# Altium PCB PCB_layout.PcbDoc
Units mil, origin at the board's own origin, x right, y up, seen from the top; angles counter-clockwise.
Board outline 2825 x 2920 mil, 2 copper layers (Top Layer, Bottom Layer); 41 components, 32 nets, 139 pads, 18 vias.
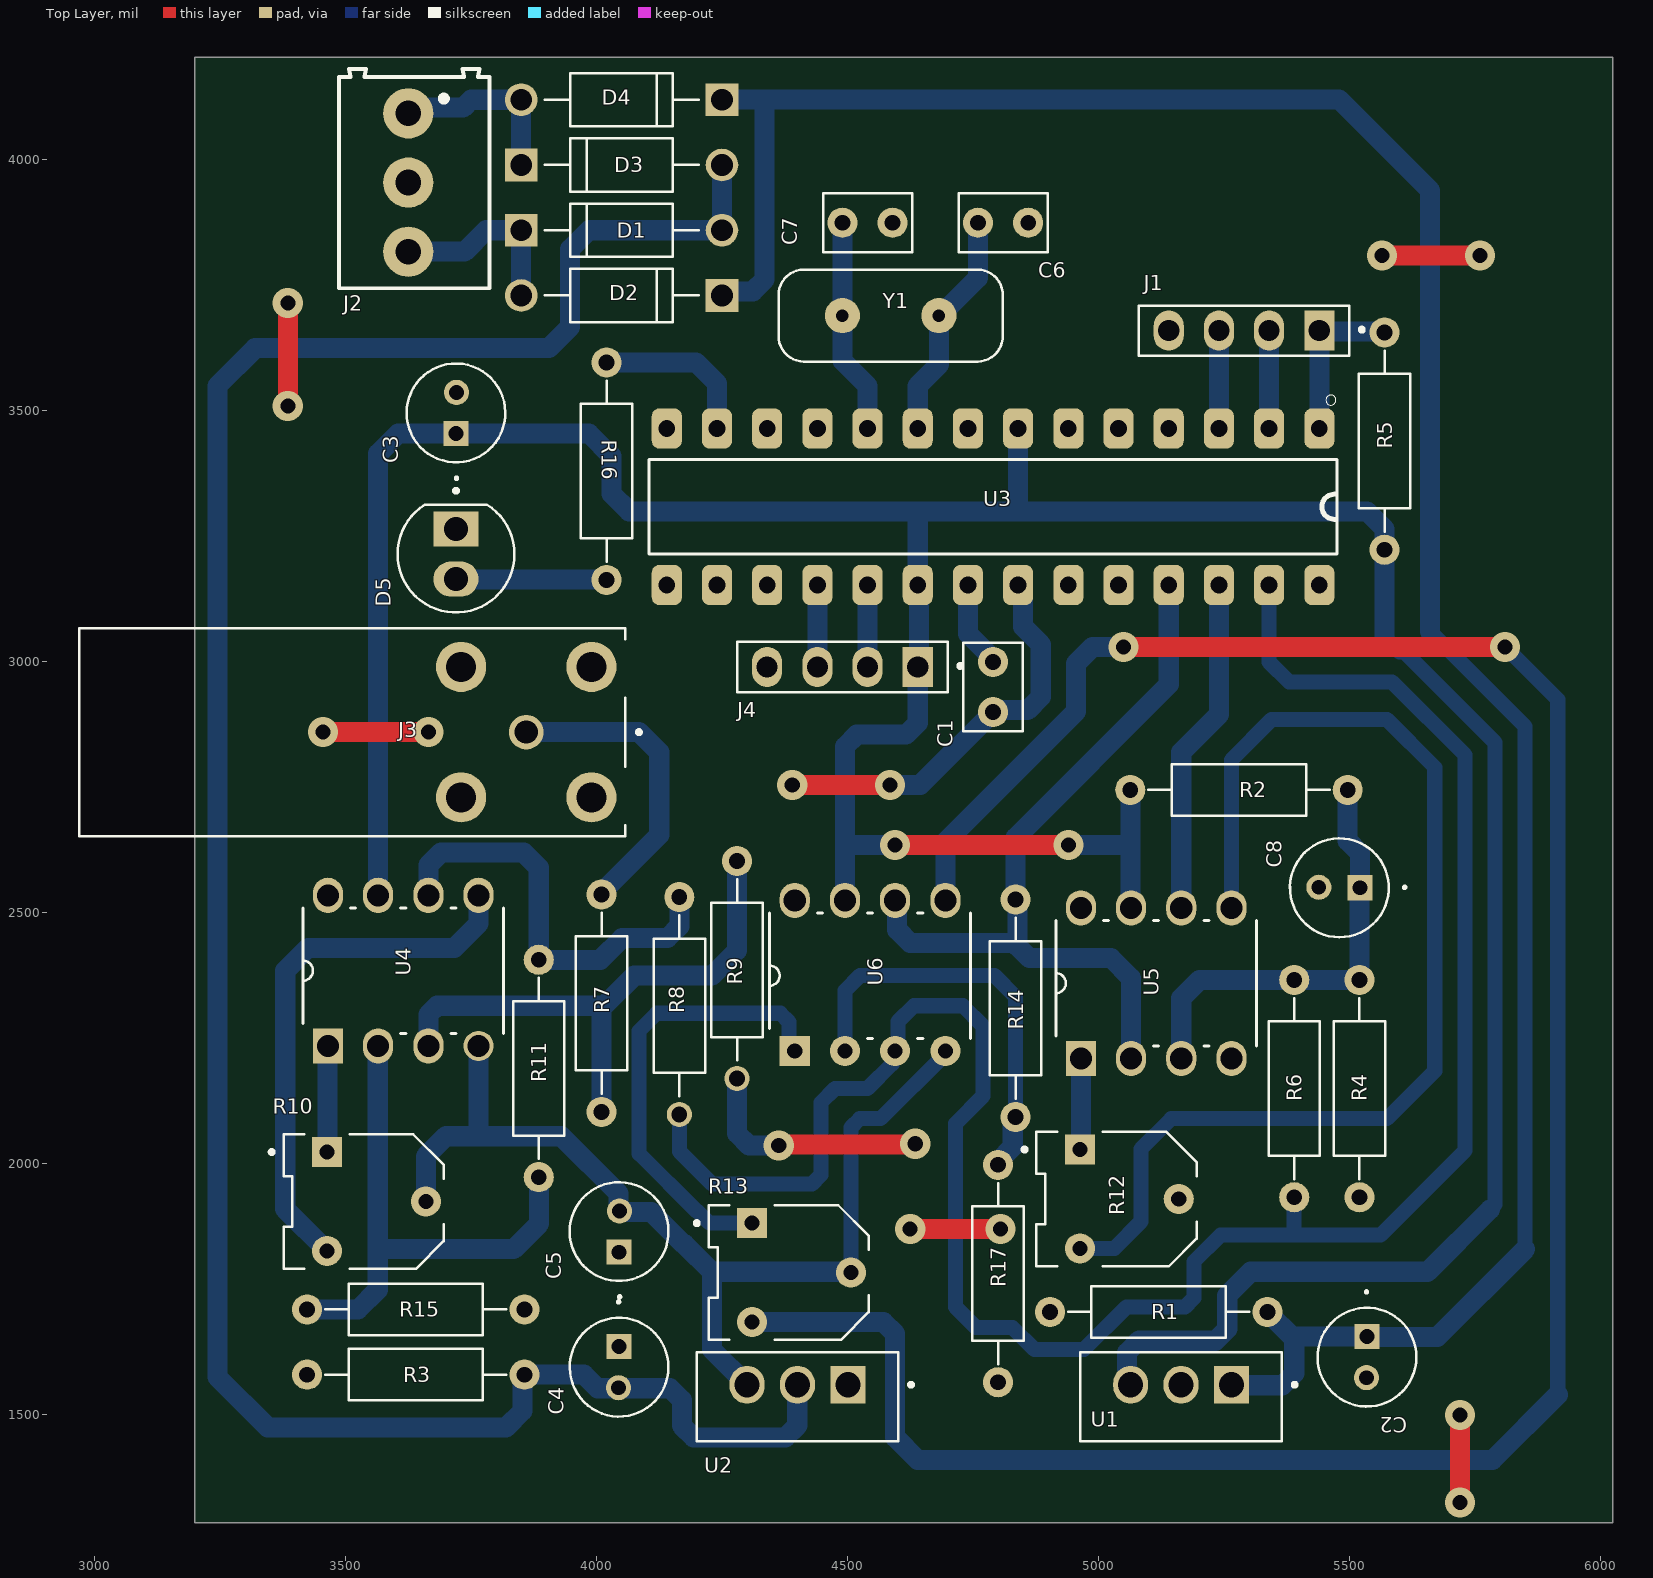
[diagram p0: Top Layer view]
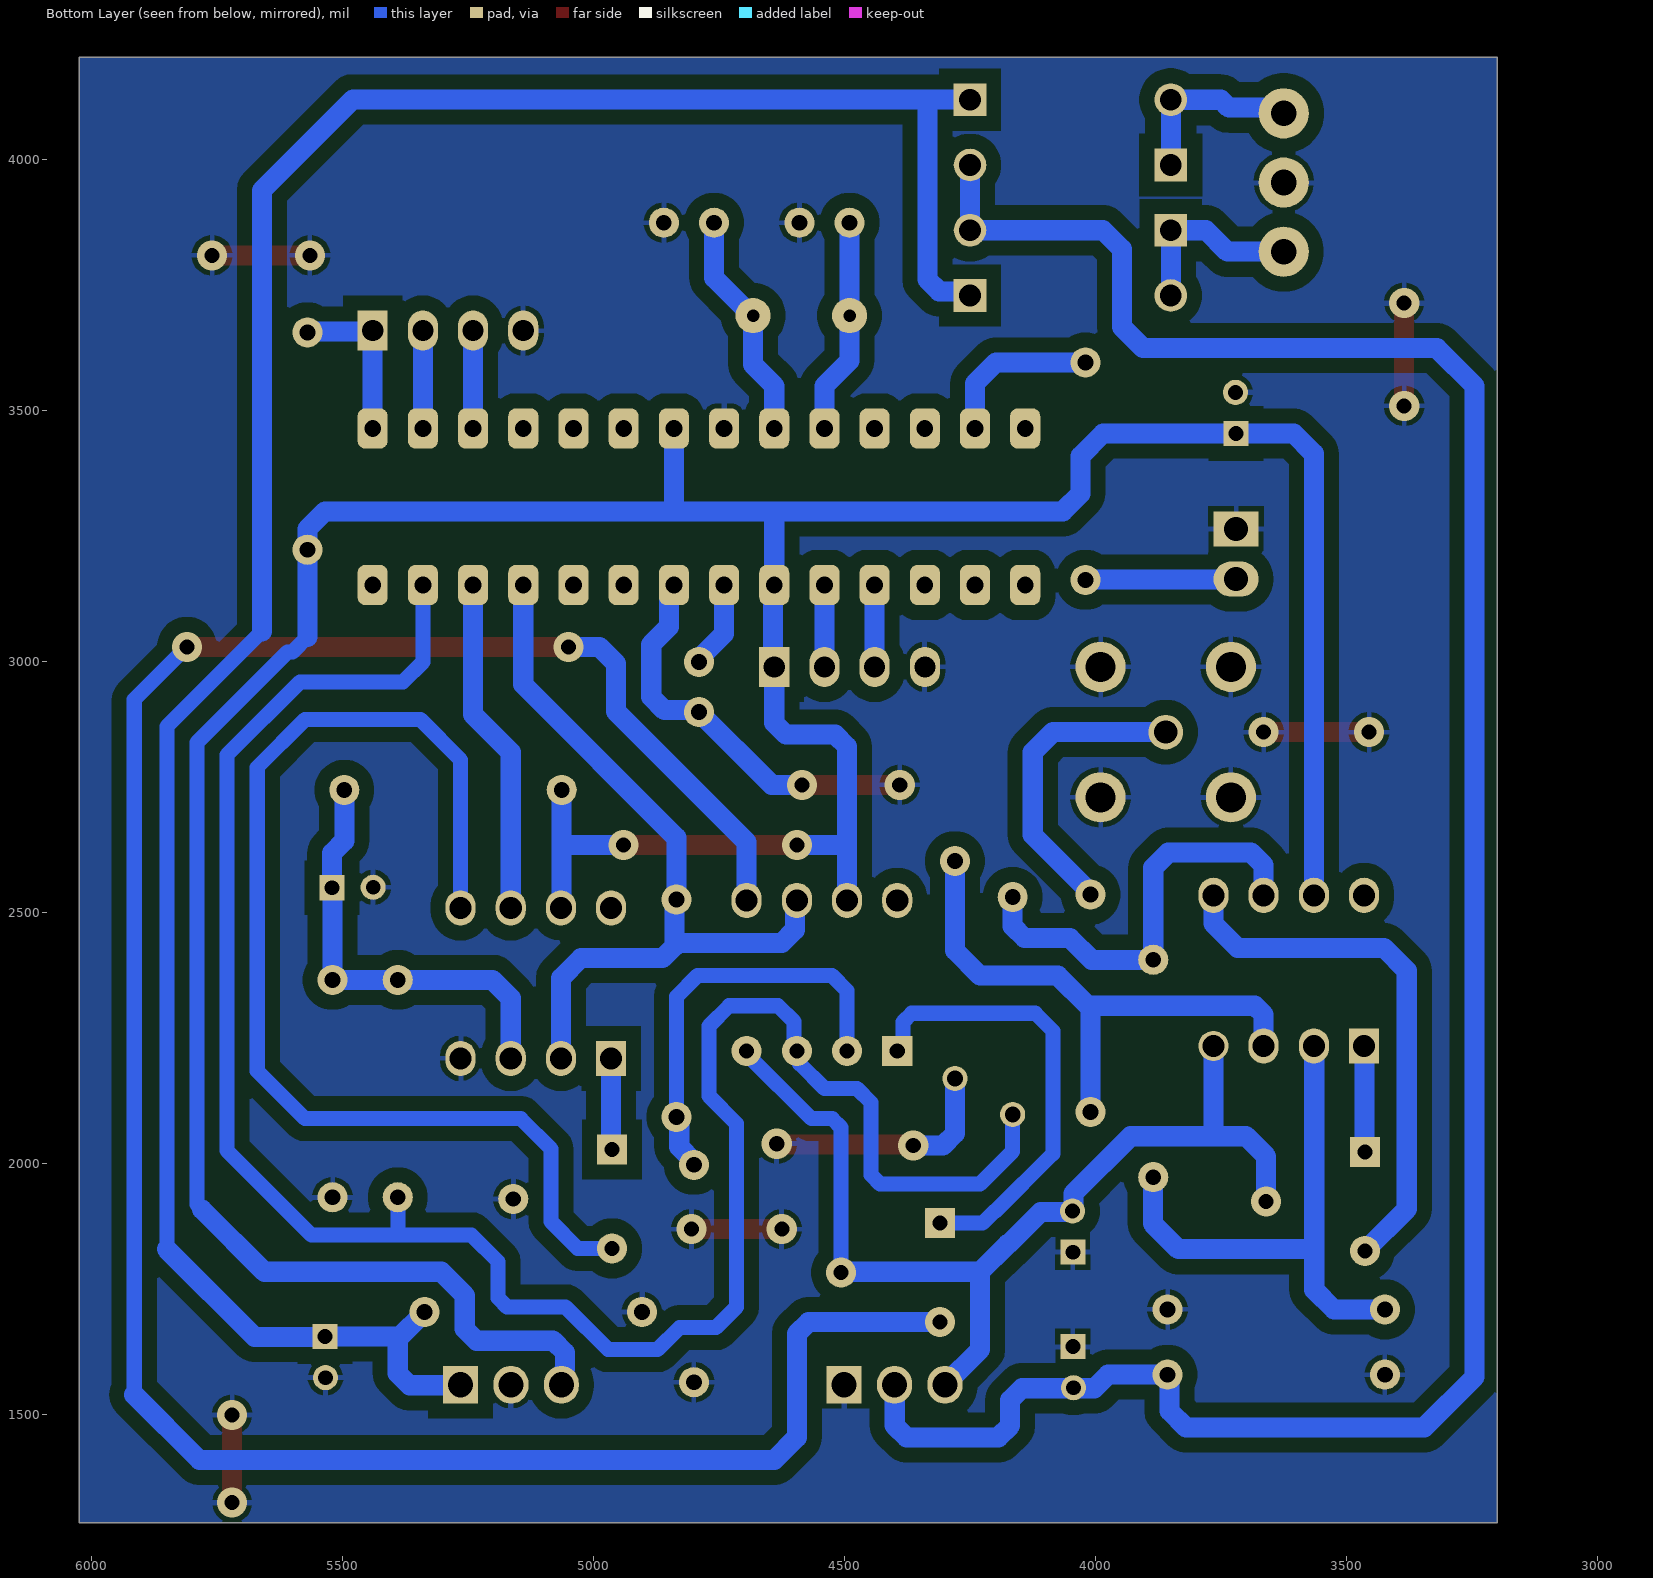
[diagram p1: Bottom Layer view, seen from below]
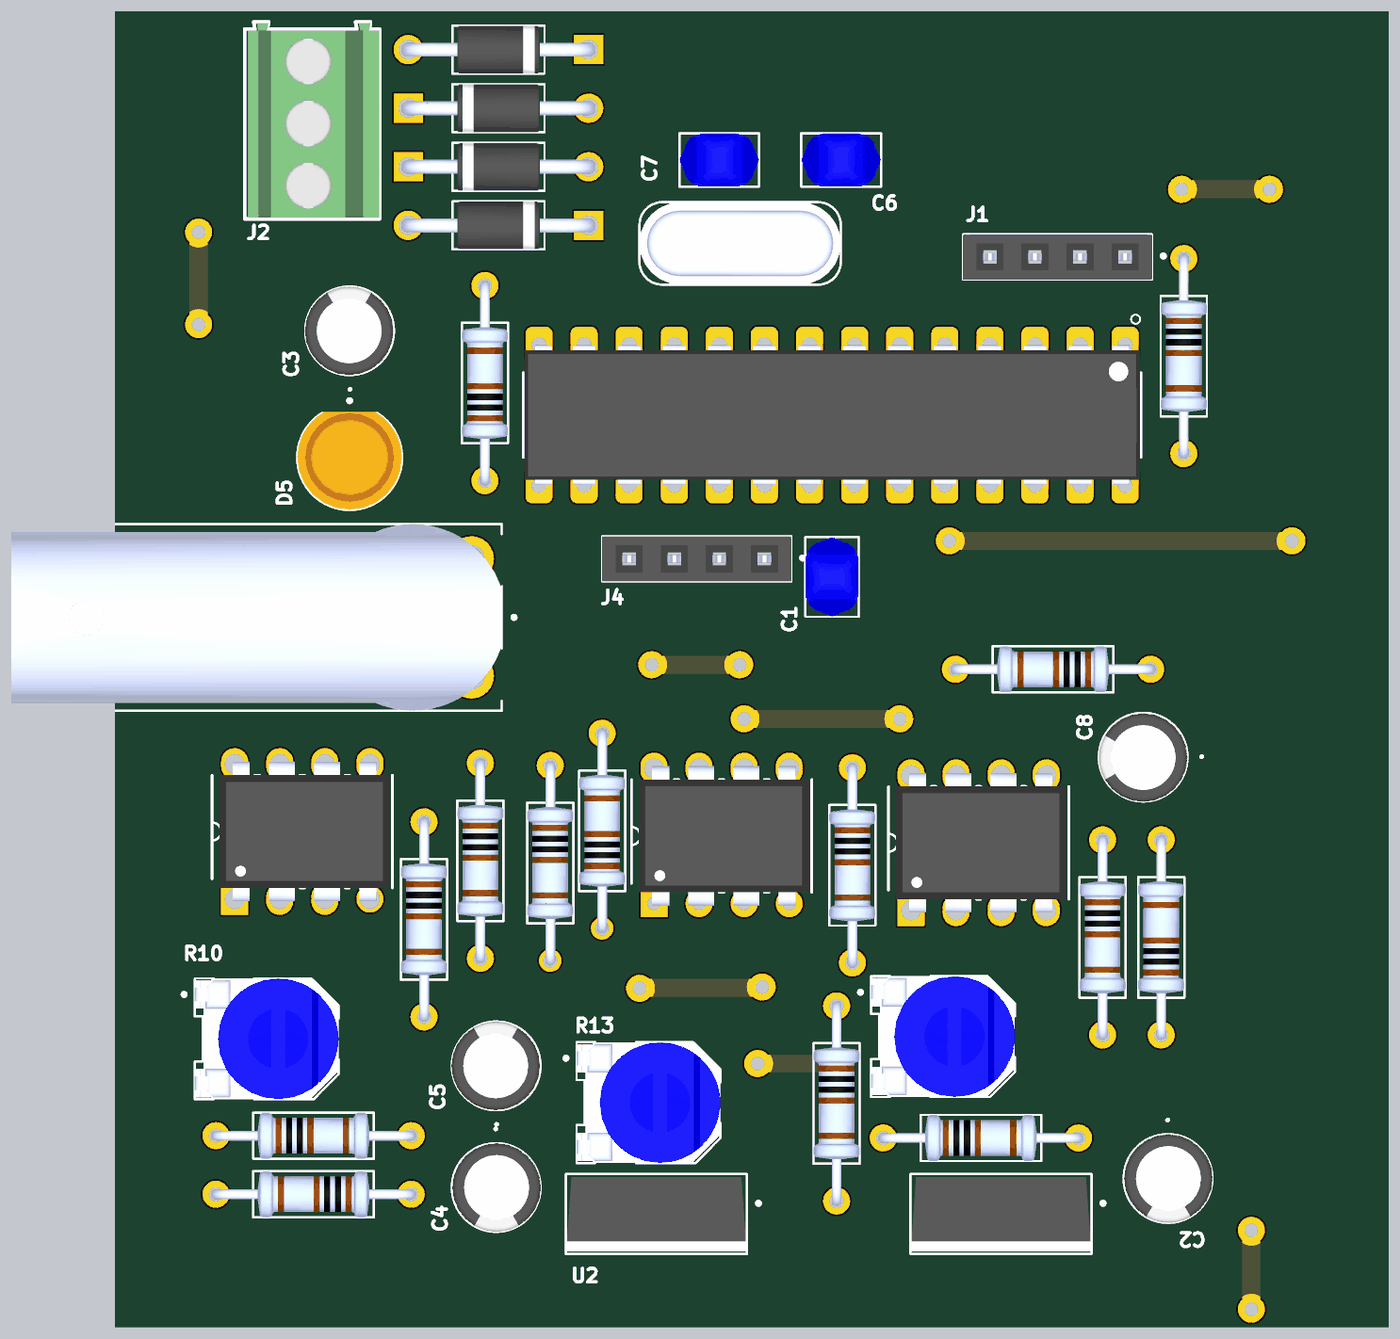
[diagram p2: 3D render of the assembled board from above, using the file's embedded part models]

## Layer stack, top to bottom
Top Solder: solder mask 0.4, Solder Resist, Dk 3.5
Top Layer: signal copper 1.4
Dielectric 1: dielectric 12.6, FR-4, Dk 4.8
Bottom Layer: signal copper 1.4
Bottom Solder: solder mask 0.4, Solder Resist, Dk 3.5

## Board outline
3200,1285 6025,1285 6025,4205 3200,4205

## Design rules (kind name [scope] priority, off if disabled: settings)
Clearance [All] p1: gap=30 ignorepadtopadclearanceinfootprint=FALSE
PolygonConnect [All] p1: connectstyle=Relief reliefconductorwidth=10 reliefentries=4 polygonreliefangle="90 Angle" airgapwidth=10
RoutingVias [All] p1: holewidth=30 width=60 viastyle="Through Hole" minholewidth=30 minwidth=60 maxholewidth=30 maxwidth=60
SolderMaskExpansion [All] p1: expansion=4 istentingtop=FALSE
Width [All] p1: maxlimit=50 minlimit=30 preferedwidth=40
30 further rules are at their usual default settings.

## Components (designator, comment, footprint, x,y, rotation, side; value= is the part's Value field where it differs from the comment)
C1 "100nF" CAPRB500W50L450T300H550 4790,3000 r270 top
C2 "470uF" CAPPRD500W50D500H1100 5535,1615 r270 top
C3 "10uF" CAPPRD500W50D500H1100 3720,3496 r90 top
C4 "470uF" CAPPRD500W50D500H1100 4045,1595 r270 top
C5 "10uF" CAPPRD500W50D500H1100 4045,1865 r90 top
C6 "22pF" CAPRB500W50L450T300H550 4760,3875 r0 top
C7 "22pF" CAPRB500W50L450T300H550 4490,3875 r0 top
C8 "100uF" CAPPRD500W50D500H1100 5480,2550 r180 top
D1 "1N4007" DIOAD1060W80L520D270 4050,3860 r0 top
D2 "1N4007" DIOAD1060W80L520D270 4050,3730 r180 top
D3 "1N4007" DIOAD1060W80L520D270 4050,3990 r0 top
D4 "1N4007" DIOAD1060W80L520D270 4050,4120 r180 top
D5 "L08R5000Q1" LEDRD254W57D500H1070 3720,3215 r270 top
J1 "Header 3" SULLINS_PPTC041LFBN-RC 5290,3660 r180 top
J2 "TBlock 3" 691214110003 3625,3955 r270 top
J3 "BNC Connector" MOLEX_0731711640 3860.08,2860.08 r270 top
J4 "Header 3" SULLINS_PPTC041LFBN-RC 4490,2990 r180 top
R1 "10k" RESAD1100W55L680D260#1 5120,1705 r180 top
R2 "1k" RESAD1100W55L680D260#1 5280,2745 r0 top
R3 "10k" RESAD1100W55L680D260#1 3640,1580 r0 top
R4 "1k" RESAD1100W55L680D260#1 5520,2150 r270 top
R5 "10k" RESAD1100W55L680D260#1 5570,3440 r90 top
R6 "10k" RESAD1100W55L680D260#1 5390,2150 r90 top
R7 "110k" RESAD1100W55L680D260#1 4010,2320 r90 top
R8 "10k" RESAD1100W55L680D260#2 4165,2315 r90 top
R9 "10k" RESAD1100W55L680D260#3 4280,2386.54 r270 top
R10 "10k" TRIM_3306F-1-105 3561.57,1925 r0 top
R11 "15k" RESAD1100W55L680D260#1 3885,2190 r90 top
R12 "10k" TRIM_3306F-1-105 5061.57,1930 r0 top
R13 "10k" TRIM_3306F-1-105 4408.43,1783.43 r0 top
R14 "10k" RESAD1100W55L680D260#1 4835,2310 r90 top
R15 "10k" RESAD1100W55L680D260#1 3640,1710 r180 top
R16 "220" RESAD1100W55L680D260#1 4020,3380 r270 top
R17 "10k" RESAD1100W55L680D260#1 4800,1781.54 r90 top
U1 "LM7805" TO255P1020X450X1968-3 5164.61,1536.18 r180 top
U2 "LM7905" TO255P1020X450X1968-3 4400.39,1536.18 r180 top
U3 "ATMEGA328P-PU" DIP794W46P254L2967H457Q28B 4790,3309.09 r270 top
U4 "OP-Amp" DIP254P762X508-8#1 3765,2535 r90 top
U5 "OP-Amp" DIP254P762X508-8#2 5265,2510 r90 top
U6 "OP-Amp" DIP254P762X508-8#3 4695,2525 r90 top
Y1 "ECS-160-S-4" XTAL_ECS-160-20-4X 4586.06,3690 r180 top

## Footprints (in the part's own frame and the unit in brackets; to place one, negate y for a bottom-side part, rotate by r counter-clockwise, add the part's x,y. Pads: shape width x height; smd on the part's side, far side on the other; paste and mask are expansions set on the pad)
691214110003 [mm]
  round 2.54 hole 1.3: 1(-3.5,0) 2(0,0) 3(3.5,0)
  silkscreen extent -5.75,-3.5 5.35,4.1, body extent -5.68,-3.32 5.28,4.08, height 8.51
CAPPRD500W50D500H1100 [mil]
  round 50 hole 29.53: N(41,-1)
  rect 50x50 hole 29.53: P(-41,0)
  silkscreen extent -131,-98 98,98, body extent -108,-97 108,99, height 434
CAPRB500W50L450T300H550 [mil]
  round 60 hole 31.5: 1(0,0) 2(100,0)
  silkscreen extent -39,-59 139,59, body extent -38,-59 138,59, height 210
DIOAD1060W80L520D270 [mm]
  round 1.65 hole 1.1: A(5.08,0)
  rect 1.65x1.65 hole 1.1: C(-5.08,0)
  silkscreen extent -3.9,-1.35 3.9,1.35, body extent -5.47,-1.35 5.47,1.35, height 2.52
DIP254P762X508-8#1 [mil]
  rect 70x60 hole 44: 1(-300,300)
  oval 70x60 hole 44: 2(-300,200) 3(-300,100) 5(0,0) 6(0,100) 7(0,200) 8(0,300)
  round 60 hole 44: 4(-300,0)
  silkscreen extent -275,-50 -25,350, body extent -305,-44 5,334, height 200
DIP254P762X508-8#2 [mil]
  rect 70x60 hole 44: 1(-300,300)
  oval 70x60 hole 44: 2(-300,200) 3(-300,100) 4(-300,0) 5(0,0) 6(0,100) 7(0,200) 8(0,300)
  silkscreen extent -275,-50 -25,350, body extent -305,-44 5,334, height 200
DIP254P762X508-8#3 [mil]
  rect 60x60 hole 30: 1(-300,300)
  round 60 hole 30: 2(-300,200) 3(-300,100) 4(-300,0)
  oval 70x60 hole 44: 5(0,0) 6(0,100) 7(0,200) 8(0,300)
  silkscreen extent -275,-50 -25,350, body extent -305,-44 5,334, height 200
DIP794W46P254L2967H457Q28B [mil]
  rrect50% 80x60 hole 33.46: 1(-155.91,650) 2(-155.91,550) 3(-155.91,450) 4(-155.91,350) 5(-155.91,250) 6(-155.91,150) 7(-155.91,50) 8(-155.91,-50) 9(-155.91,-150) 10(-155.91,-250) 11(-155.91,-350) 12(-155.91,-450) 13(-155.91,-550) 14(-155.91,-650) 15(155.91,-650) 16(155.91,-550) 17(155.91,-450) 18(155.91,-350) 19(155.91,-250) 20(155.91,-150) 21(155.91,-50) 22(155.91,50) 23(155.91,150) 24(155.91,250) 25(155.91,350) 26(155.91,450) 27(155.91,550) 28(155.91,650)
  silkscreen extent -223,-685 94,685, body extent -156,-682 156,683, height 180
LEDRD254W57D500H1070 [mil]
  oval 70x90 hole 47.64: A(50,0)
  rect 70x90 hole 47.64: C(-50,0)
  silkscreen extent -130,-116 116,116, body extent -102,-116 116,116, height 358
MOLEX_0731711640 [mm]
  round 1.755 hole 1.17: 1(0,0)
  round 2.54 hole 1.524: 2(-3.3,3.3) 3(3.3,3.3) 4(3.3,-3.3) 5(-3.3,-3.3)
  silkscreen extent -5.26,-22.63 5.26,5.8, body extent -5.26,-22.63 5.26,5.01, height 10.89
RESAD1100W55L680D260#1 [mil]
  round 60 hole 31.5: 1(-216.54,0) 2(216.54,0)
  silkscreen extent -180,-51 180,51, body extent -227,-51 227,51, height 101
RESAD1100W55L680D260#2 [mil]
  round 50 hole 31.5: 1(-216.54,0)
  round 60 hole 31.5: 2(216.54,0)
  silkscreen extent -180,-51 180,51, body extent -227,-51 227,51, height 101
RESAD1100W55L680D260#3 [mil]
  round 60 hole 31.5: 1(-216.54,0)
  round 50 hole 31.5: 2(216.54,0)
  silkscreen extent -180,-51 180,51, body extent -227,-51 227,51, height 101
SULLINS_PPTC041LFBN-RC [mil]
  rect 60x80 hole 42.13: 1(-150,0)
  oval 60x80 hole 42.13: 2(-50,0) 3(50,0) 4(150,0)
  silkscreen extent -239,-50 210,50, body extent -210,-50 210,50, height 335
TO255P1020X450X1968-3 [mm]
  rect 1.778x1.91 hole 1.27: 1(-2.55,-0.605)
  oval 1.778x1.91 hole 1.27: 2(0,-0.605) 3(2.55,-0.605)
  silkscreen extent -5.85,-2.25 5.1,2.25, body extent -5.08,-2.09 5.08,2.11, height 22.87
TRIM_3306F-1-105 [mil]
  rect 60x60 hole 30: 1(-98.43,98.43)
  round 60 hole 30: 2(98.43,0) 3(-98.43,-98.43)
  silkscreen extent -213,-134 134,134, body extent -185,-134 134,134, height 330
XTAL_ECS-160-20-4X [mil]
  round 70 hole 24.8: 1(-96.06,0) 2(96.06,0)
  silkscreen extent -223,-92 223,92, body extent -223,-92 223,92, height 138

## Part data
C1 C6 C7: library part "Ceramic capacitor", "2200 pF Â±10% 250V Ceramic Capacitor X7R Radial", Package="Radial TDK", Check_prices=https://www.snapeda.com/parts/FG24X7R2E222KNT06/TDK/view-part/?ref=eda, Digi-Key_Part_Number=445-173386-1-ND, MF=TDK, MP=FG24X7R2E222KNT06, Purchase-URL=https://pricing.snapeda.com/search/part/FG24X7R2E222KNT06/?ref=eda, SnapEDA_Link=https://www.snapeda.com/parts/FG24X7R2E222KNT06/TDK/view-part/?ref=snap
C2 C3 C4 C5 C8: library part "Electrolytic capacitor", "FS-A", Package=None, Availability=Unavailable, MF="{'manufacturer': u'Panasonic'}", MP=EEUFS0J221B, Price=None
D1 D2 D3 D4: "Diode Switching 1KV 1A 2-Pin DO-41", Package=None, Availability=Unavailable, MP=1N4007, Price=None
D5: library part LED, "LED, Orange, Through Hole, T-1 3/4 (5mm), 30 mA, 2.1 V, 635 nm", Package=None, Availability=Unavailable, MF="{'manufacturer': u'LED Technology'}", MP=L08R5000Q1, Price=None
J1 J4: library part "Female header - 4Pins", "4 Position Header Connector Through Hole", Package=None, Availability=Warning, Check_prices=https://www.snapeda.com/parts/PPTC041LFBN-RC/Sullins%20Connector%20Solutions/view-part/285917/?ref=eda, MF="Sullins Connector", MP=PPTC041LFBN-RC, Price=None, Purchase-URL=https://pricing.snapeda.com/search/part/PPTC041LFBN-RC/?ref=eda, SnapEDA_Link=https://www.snapeda.com/parts/PPTC041LFBN-RC/Sullins%20Connector%20Solutions/view-part/285917/?ref=snap
J2: library part "Terminal blocks - 3Pins (Small)", "3 Position Wire to Board Terminal Block Horizontal with Board 0.138 (3.50mm) Through Hole", Package=None, Availability="In Stock", Check_prices=https://www.snapeda.com/parts/691214110003/Wurth+Elektronik/view-part/?ref=eda, MF="Wurth Elektronik", MP=691214110003, Price=None, Purchase-URL=https://pricing.snapeda.com/search/part/691214110003/?ref=eda, SnapEDA_Link=https://www.snapeda.com/parts/691214110003/Wurth+Elektronik/view-part/?ref=snap
J3: "BNC Connector Jack, Female Socket 75Ohm Through Hole, Right Angle Solder", Package=None, Availability=Warning, Check_prices=https://www.snapeda.com/parts/0731711640/Molex/view-part/3208873/?ref=eda, MF=Molex, MP=0731711640, Price=None, Purchase-URL=https://pricing.snapeda.com/search/part/0731711640/?ref=eda, SnapEDA_Link=https://www.snapeda.com/parts/0731711640/Molex/view-part/3208873/?ref=snap
R1 R2 R3 R4 R5 R6 R7 R8 R9 R11 R14 R15 R16 R17: library part "Resistor (0.25W)", "(MFR-25FBF52-10K) 10,2 kOhm bei 1% 0,25W, 1/4W Durchbohrlochwiderstand Axial Metal Film", Package="Axial Yageo", Digi-Key_Part_Number=10.2KXBK-ND, MF=Yageo, MP=MFR-25FBF52-10K, Purchase-URL=https://pricing.snapeda.com/search/part/MFR-25FBF52-10K/?ref=eda, SnapEDA_Link=https://www.snapeda.com/parts/MFR-25FBF52-10K/Yageo/view-part/424333/?ref=snap
R10 R12 R13: library part Potentiometer1, "(3306F-1-105) 1 MOhms 0.2W, 1/5W PC Pins Through Hole Trimmer Potentiometer Cermet 1 Turn Top Adjustment", Package="3306F Bourns", Availability=Good, Check_prices=https://www.snapeda.com/parts/3306F-1-105/Bourns%20-%20J.W.%20Miller/view-part/862876/?ref=eda, MF=Bourns, MP=3306F-1-105, Price=None, Purchase-URL=https://pricing.snapeda.com/search/part/3306F-1-105/?ref=eda, SnapEDA_Link=https://www.snapeda.com/parts/3306F-1-105/Bourns%20-%20J.W.%20Miller/view-part/862876/?ref=snap
U1: library part LM78__, Package=None, Availability=Unavailable, MP=LM7805CT/NOPB, Price=None
U2: library part LM79__
U3: "ATmega Series 20 MHz 32 KB Flash 2 KB SRAM 8-Bit Microcontroller - DIP-28", Package=None, Availability=Unavailable, MP=ATMEGA328P-PU, Price=None
U4 U5 U6: library part LM741CN, "General Purpose Amplifier 1 Circuit - 8-DIP", Package="DIP-8 ON Semiconductor", Availability="In Stock", Check_prices=https://www.snapeda.com/parts/LM741CN/Onsemi/view-part/?ref=eda, MF="ON Semiconductor", MP=LM741CN, Price=None, SnapEDA_Link=https://www.snapeda.com/parts/LM741CN/Onsemi/view-part/?ref=snap
Y1: library part "Crystal oscilator", "CRYSTAL T/H", Package=None, Availability=Unavailable, MF="{'manufacturer': u'ECS Inc.'}", MP=ECS-160-S-4, Price=None

## Via types
v1: diameter 60, hole 30, Top Layer to Bottom Layer, 18 vias

## Nets (pads, with @x,y where several pads share a name; then routed paths per layer and width w, separated by ;. In a path a pad name is that pad's centre, name@x,y a point inside that pad or via, vN(x,y) a via of type N, cw(c..) or ccw(c..) an arc to the next point about the centre after c; other vN are vias at no path point)
+5: C3.P J4.1 R2.1 R5.1 U1.3 U3.7 U3.20 U4.7 U5.7 U6.7 | length 7276.3
  Top Layer w40: v1(4595,2635) v1(4940,2635)
  Bottom Layer w30: U3.20 U3.20@4642.5,3150.69 ; 5570,3050 5600,3020 5609.71,3020 5790,2839.71 5790,1919.11 5780,1909.11
  Bottom Layer w40: U4.7 3565,3415 3605,3455 C3.P 3985,3455 4030,3410 4030,3335 4065,3300 4640,3300 ; U6.7 4495,2635 ; v1(4595,2635) 4495,2635 ; J4.1 4640,2878.43 4616.57,2855 4518.43,2855 4495,2831.57 4495,2635 ; U3.20 4640,3300 ; J4.1@4642.5,3007.5 U3.20@4642.5,3150.69 ; U3.7 4840,3305 4835,3300 ; v1(4940,2635) 5064.23,2635 ; U1.3 5058.47,1565.74 5058.47,1589.55 5056.99,1591.03 5056.99,1624.17 5080.43,1647.6 5233.1,1647.6 5256.54,1671.03 5256.54,1738.14 5303.4,1785 5655.89,1785 5780,1909.11 ; R2.1@5064.23,2745 5064.23,2635 ; U5.7 5064.23,2510.77 5064.23,2635 ; 5570,3050 R5.1 5570,3265 5535,3300 4835,3300 ; 4640,3300 4835,3300
+12: C2.P D2.C D4.C R1.1 U1.1 | length 4941.8
  Bottom Layer w30: 5660.81,3060.81 5850,2871.63 5850,1830
  Bottom Layer w40: D2.C 4258.24,3738.24 4311.57,3738.24 4335,3761.68 4335,4120.67 ; D4.C@4250.67,4120.67 4335,4120.67 ; U1.1 5266,1559 5366.57,1559 5390,1582.43 5390,1651.54 R1.1 ; 5390.95,1656 C2.P 5536,1655 5675,1655 5850,1830 ; 5660.81,3060.81 5660.81,3939.19 5479.33,4120.67 4335,4120.67
-5: C5.N R10.2 R13.2 U2.3 U4.4 U6.4 | length 2071.7
  Bottom Layer w30: R13.2 4506.85,2072.43 4524.42,2090 4566.07,2090 4695,2218.93 U6.4
  Bottom Layer w40: R10.2 3660,2015 3700,2055 3765,2055 ; U4.4 3765,2055 ; U2.3 4230,1630 4230,1785 ; R13.2@4516.09,1785 4230,1785 ; 3765,2055 3930,2055 4044.09,1940.91 4044.09,1907.91 4047.91,1904.09 4109.14,1904.09 4173.22,1840 4175,1840 4230,1785
-12: C4.N D1.A D3.A R3.2 U2.2 | length 4788.3
  Bottom Layer w40: D3.A D1.A 3985,3860 3947.5,3822.5 3947.5,3667.5 3905,3625 3320,3625 3245,3550 3245,1575 3345,1475 3820,1475 3852.71,1507.71 3852.71,1576.17 R3.2 3975,1580 4002,1553 4044,1553 4146.57,1553 4170,1529.57 4170,1478.43 4193.43,1455 4376.57,1455 4400,1478.43 U2.2@4400,1566.11
frequence: U3.26 U5.6 | length 674.3
  Bottom Layer w40: U5.6 5165,2820 5240,2895 U3.26
GND: C1.2 C2.N C3.N C4.P C5.P C6.2 C7.2 C8.N D5.C J1.4 J2.2 J3.2 J3.3 J3.4 J3.5 J4.4 R1.2 R3.1 R4.2 R9.2 R12.2 R15.1 R17.1 U1.2 U2.1 U3.8 U3.22 U5.4 | length 2250
  Top Layer w40: v1(3385,3510) v1(3385,3715) ; v1(3455,2860) v1(3665,2860) ; v1(4363.09,2036.91) 4364.63,2038.46 4633.46,2038.46 v1(4635,2040) ; v1(4390,2755) v1(4585,2755) ; v1(4625,1870) v1(4805,1870) ; v1(5565,3810) v1(5760,3810) ; v1(5720,1325) v1(5720,1500)
  Bottom Layer w40: R9.2 4280,2060.34 4303.43,2036.91 v1(4363.09,2036.91) ; v1(4585,2755) 4645,2755 C1.2 4793.83,2903.83 4858.83,2903.83 4885,2930 4885,3035 4850,3070 4850,3143.19 U3.22
indicator: R16.1 U3.13 | length 327.2
  Bottom Layer w40: R16.1 4198.46,3596.54 4240,3555 U3.13
input_siginal: R6.1 R8.1 U3.27 U6.3 | length 4318.8
  Bottom Layer w30: R8.1 4165.27,2098.2 4165.27,2024.73 4230,1960 4429.28,1960 4446.85,1977.57 4446.85,2121.85 4475,2150 4540,2150 4589.26,2199.26 4589.26,2219.26 4600.74,2230.74 4600.74,2283.46 4632.28,2315 4729.85,2315 4770,2274.85 4770,2135 4715,2080 4715,1715 4756.07,1673.93 4828.46,1673.93 4872.4,1630 4970.9,1630 5055.9,1715 5172.43,1715 5190,1732.57 5190,1805 5243.46,1858.46 5388.46,1858.46 5390,1860 ; U3.27 5340,3000 5380,2960 5584.85,2960 5730,2814.85 5730,2026.19 5562.28,1858.46 5391.54,1858.46 5390,1860 ; R6.1 5390,1860
NetC1_1: C1.1 U3.21 | length 173.9
  Bottom Layer w30: C1.1 C1.1@4790,3006.07
  Bottom Layer w40: U3.21 4740,3056.07 C1.1@4790,3006.07
NetD1_C: D1.C D2.A J2.3 | length 372.7
  Bottom Layer w40: J2.3 3737.2,3817.2 3780,3860 D1.C D2.A
NetD3_C: D3.C D4.A J2.1 | length 366.3
  Bottom Layer w40: J2.1 3636.48,4104.28 3734.28,4104.28 3750,4120 D4.A D3.C
NetD5_A: D5.A R16.2 | length 300.3
  Bottom Layer w40: D5.A@3720,3164.23 4019.23,3164.23 R16.2
NetJ3_1: J3.1 R7.2 | length 612.6
  Bottom Layer w40: J3.1 4084.92,2860.08 4125,2820 4125,2655 4010,2540 R7.2
NetR7_1: R7.1 R9.1 U4.3 | length 1114.9
  Bottom Layer w40: U4.3 3665,2297.43 3682.57,2315 4010,2315 R7.1 ; 4015,2315 4075,2375 4230,2375 4280,2425 R9.1
NetR8_2: R8.2 R11.2 U4.6 | length 852.1
  Bottom Layer w40: U4.6 3665,2595 3690,2620 3855,2620 3885,2590 R11.2 4007.54,2406.54 4051.01,2450 4141.57,2450 4165,2473.43 R8.2
NetR10_1: R10.1 U4.1 | length 212.3
  Bottom Layer w40: R10.1 3464.07,2024.35 3464.07,2234.07 U4.1
NetR10_3: R10.3 U4.5 | length 1073.1
  Bottom Layer w40: R10.3 3380,1909.72 3380,2385 3425,2430 3716.57,2430 3765,2478.43 U4.5
NetR11_1: R11.1 R15.2 U4.2 | length 1077.6
  Bottom Layer w40: R15.2 3525,1710 3564.23,1749.23 3564.23,1830 ; U4.2 3564.23,2234.23 3564.23,1830 ; R11.1@3885.85,1972.62 3885.85,1880.85 3835,1830 3564.23,1830
NetR12_1: R12.1 U5.1 | length 181.6
  Bottom Layer w40: R12.1@4965,2028.43 U5.1
NetR12_3: R12.3 U5.5 | length 2315.7
  Bottom Layer w30: R12.3 5031.57,1831.57 5085,1885 5085,2030 5145,2090 5575,2090 5670,2185 5670,2790 5575,2885 5345,2885 5265,2805 U5.5
NetR13_1: R13.1 U6.1 | length 909.8
  Bottom Layer w30: R13.1 4225.07,1881.85 4201.92,1905 4200.15,1905 4085,2020.15 4085,2265 4120,2300 4366.21,2300 4383.79,2282.43 4383.79,2236.21 U6.1
NetR13_3: R13.3 U6.5 | length 4875.4
  Top Layer w40: v1(5050,3030) v1(5810,3030)
  Bottom Layer w30: v1(5810,3030) 5915,2925 5915,1540
  Bottom Layer w40: R13.3 4571.57,1685 4595,1661.57 4595,1455 4640,1410 5785,1410 5915,1540 ; U6.5 4695,2641.01 4955,2901.01 4955,2996.57 4988.43,3030 v1(5050,3030)
NetR14_1: R14.1 R17.2 U6.2 | length 842.9
  Bottom Layer w30: U6.2 4495,2345 4525,2375 4793.08,2375 4835,2333.08 4835,2098.46 R14.1@4830,2093.46 ; R17.2@4800,2001.54 R17.2@4800,2009.65 ; R14.1@4829.26,2087.72 R14.1
  Bottom Layer w40: R17.2@4800,2004.65 4829.26,2033.91 R14.1@4829.26,2087.72
reset: J1.1 R5.2 U3.1 | length 326.4
  Bottom Layer w30: J1.1 J1.1@5441.73,3658.27 ; R5.2@5568.27,3658.27 R5.2
  Bottom Layer w40: U3.1 J1.1 ; J1.1@5441.73,3658.27 R5.2@5568.27,3658.27
rx: J1.3 U3.3 | length 195
  Bottom Layer w40: U3.3 J1.3
siginal: R14.2 U3.25 U5.2 U6.6 | length 1574.1
  Bottom Layer w40: U6.6 4598.83,2521.17 4598.83,2466.17 4625,2440 4832.26,2440 4838.83,2433.43 ; U5.2 5065,2370 5025,2410 4862.26,2410 4838.83,2433.43 ; U3.25 5140,2955 4835,2650 R14.2 4838.83,2522.71 4838.83,2433.43
TFT_rx: J4.3 U3.18 | length 163.2
  Bottom Layer w40: J4.3 U3.18
TFT_tx: J4.2 U3.19 | length 163.2
  Bottom Layer w40: J4.2 U3.19
tx: J1.2 U3.2 | length 195
  Bottom Layer w40: U3.2 J1.2
Vref: C8.P R2.2 R4.1 R6.2 U5.3 | length 877.7
  Bottom Layer w40: U5.3 5165,2330 5201.54,2366.54 R6.2 R4.1 C8.P@5520,2549 ; R2.2 5496.54,2643.46 5521,2619 C8.P
xtal_1: C6.1 U3.9 Y1.1 | length 461.4
  Bottom Layer w40: U3.9 4640,3550 4682.13,3592.13 Y1.1 4685,3690 4760,3765 C6.1
xtal_2: C7.1 U3.10 Y1.2 | length 430.7
  Bottom Layer w40: C7.1 Y1.2 4490,3600 4540,3550 U3.10
pads on no net: U3.4 U3.5 U3.6 U3.11 U3.12 U3.14 U3.15 U3.16 U3.17 U3.23 U3.24 U3.28 U4.8 U5.8 U6.8

## Polygon pours and split planes (outlines as drawn)
GND on Bottom Layer "NONET_L02_P-001" (solid, remove dead copper, pour order 0): 3200,4205 3200,1285 6025,1285 6025,4205